# Altium PCB PCB1.PcbDoc
Units mil, origin at the board's own origin, x right, y up, seen from the top; angles counter-clockwise.
Board outline 2850 x 2500 mil, 2 copper layers (Top Layer, Bottom Layer); 16 components, 5 nets, 36 pads, 0 vias.
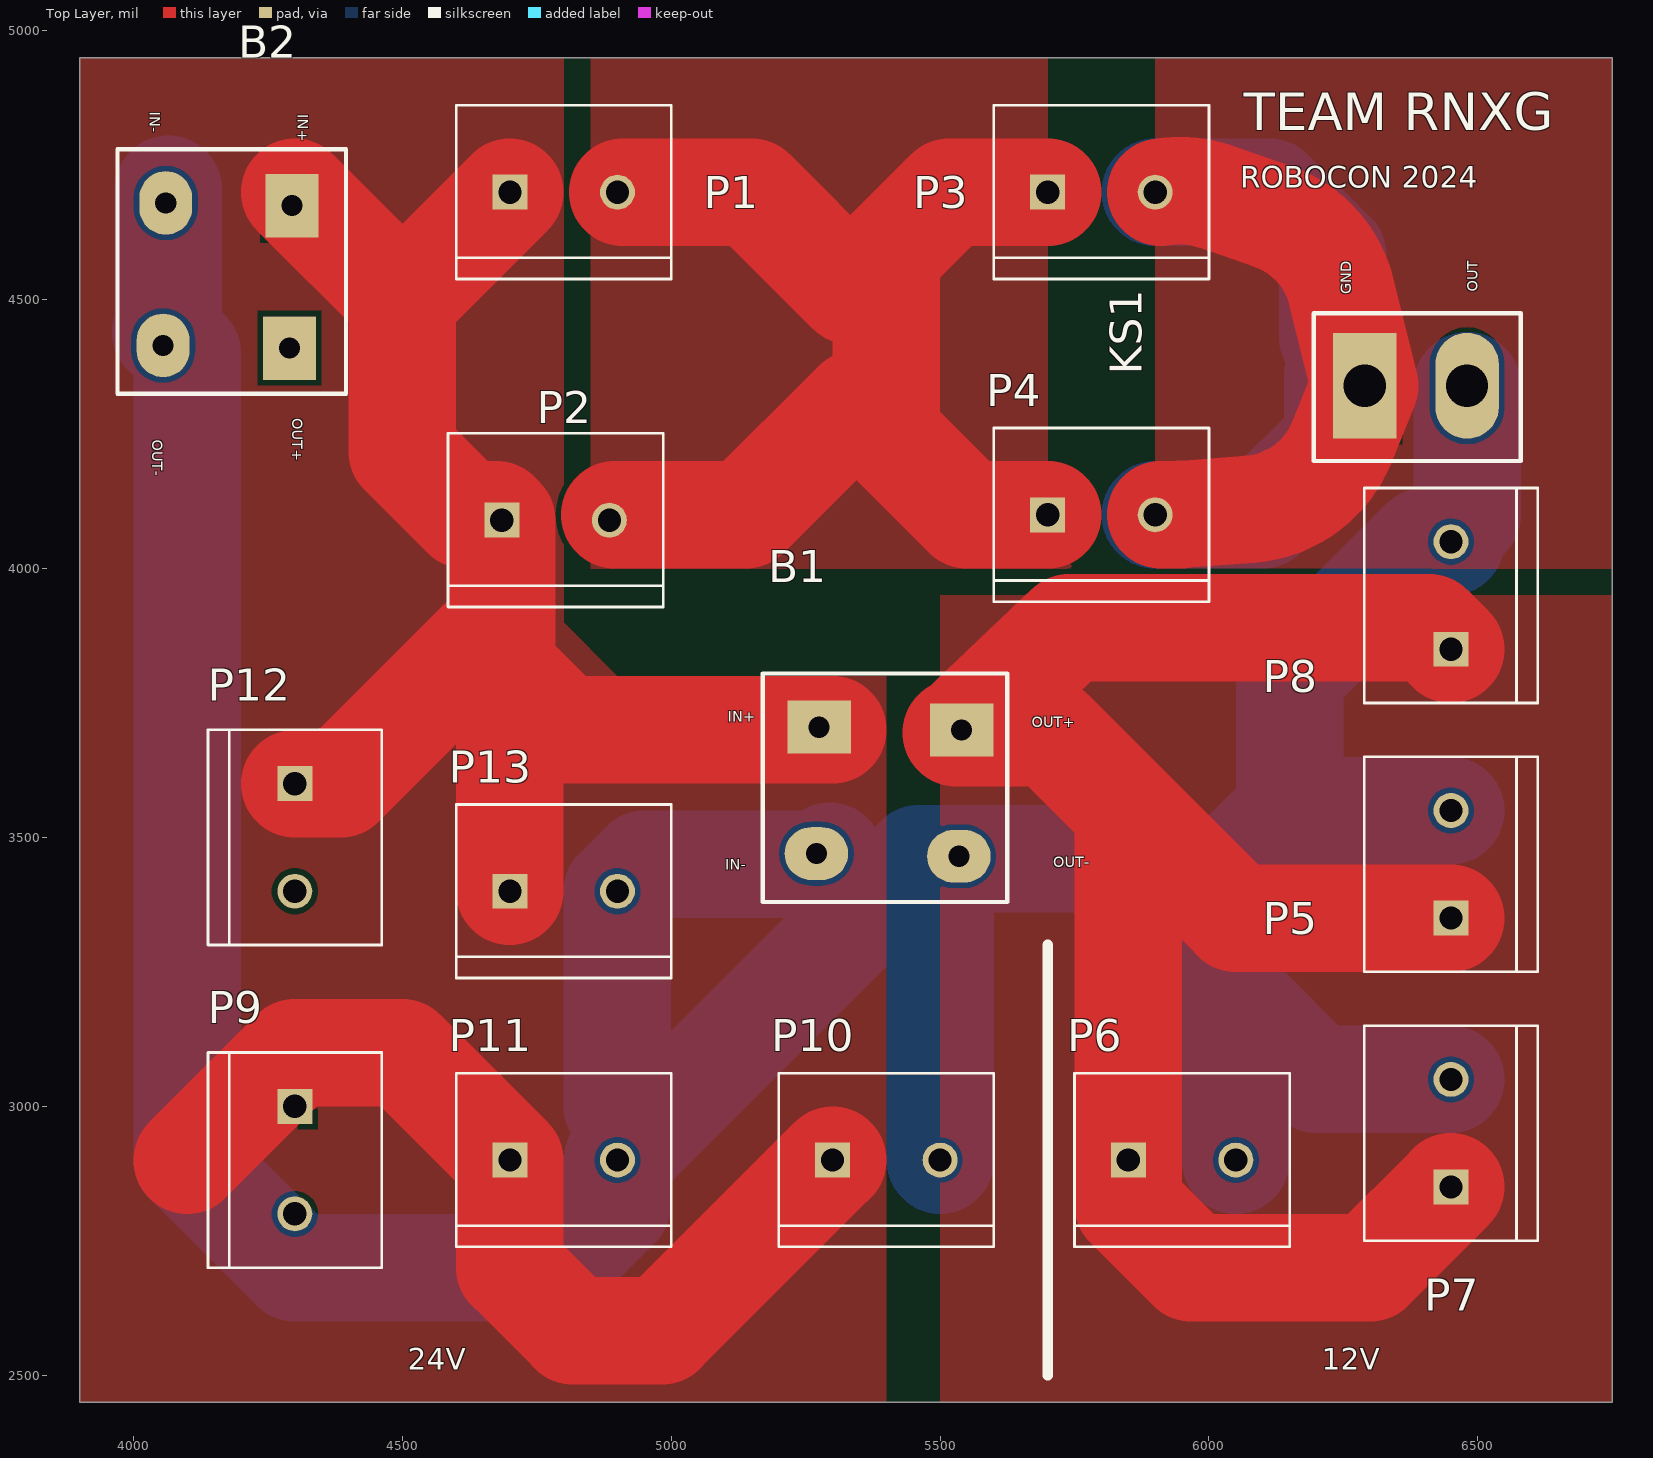
[diagram p0: Top Layer view]
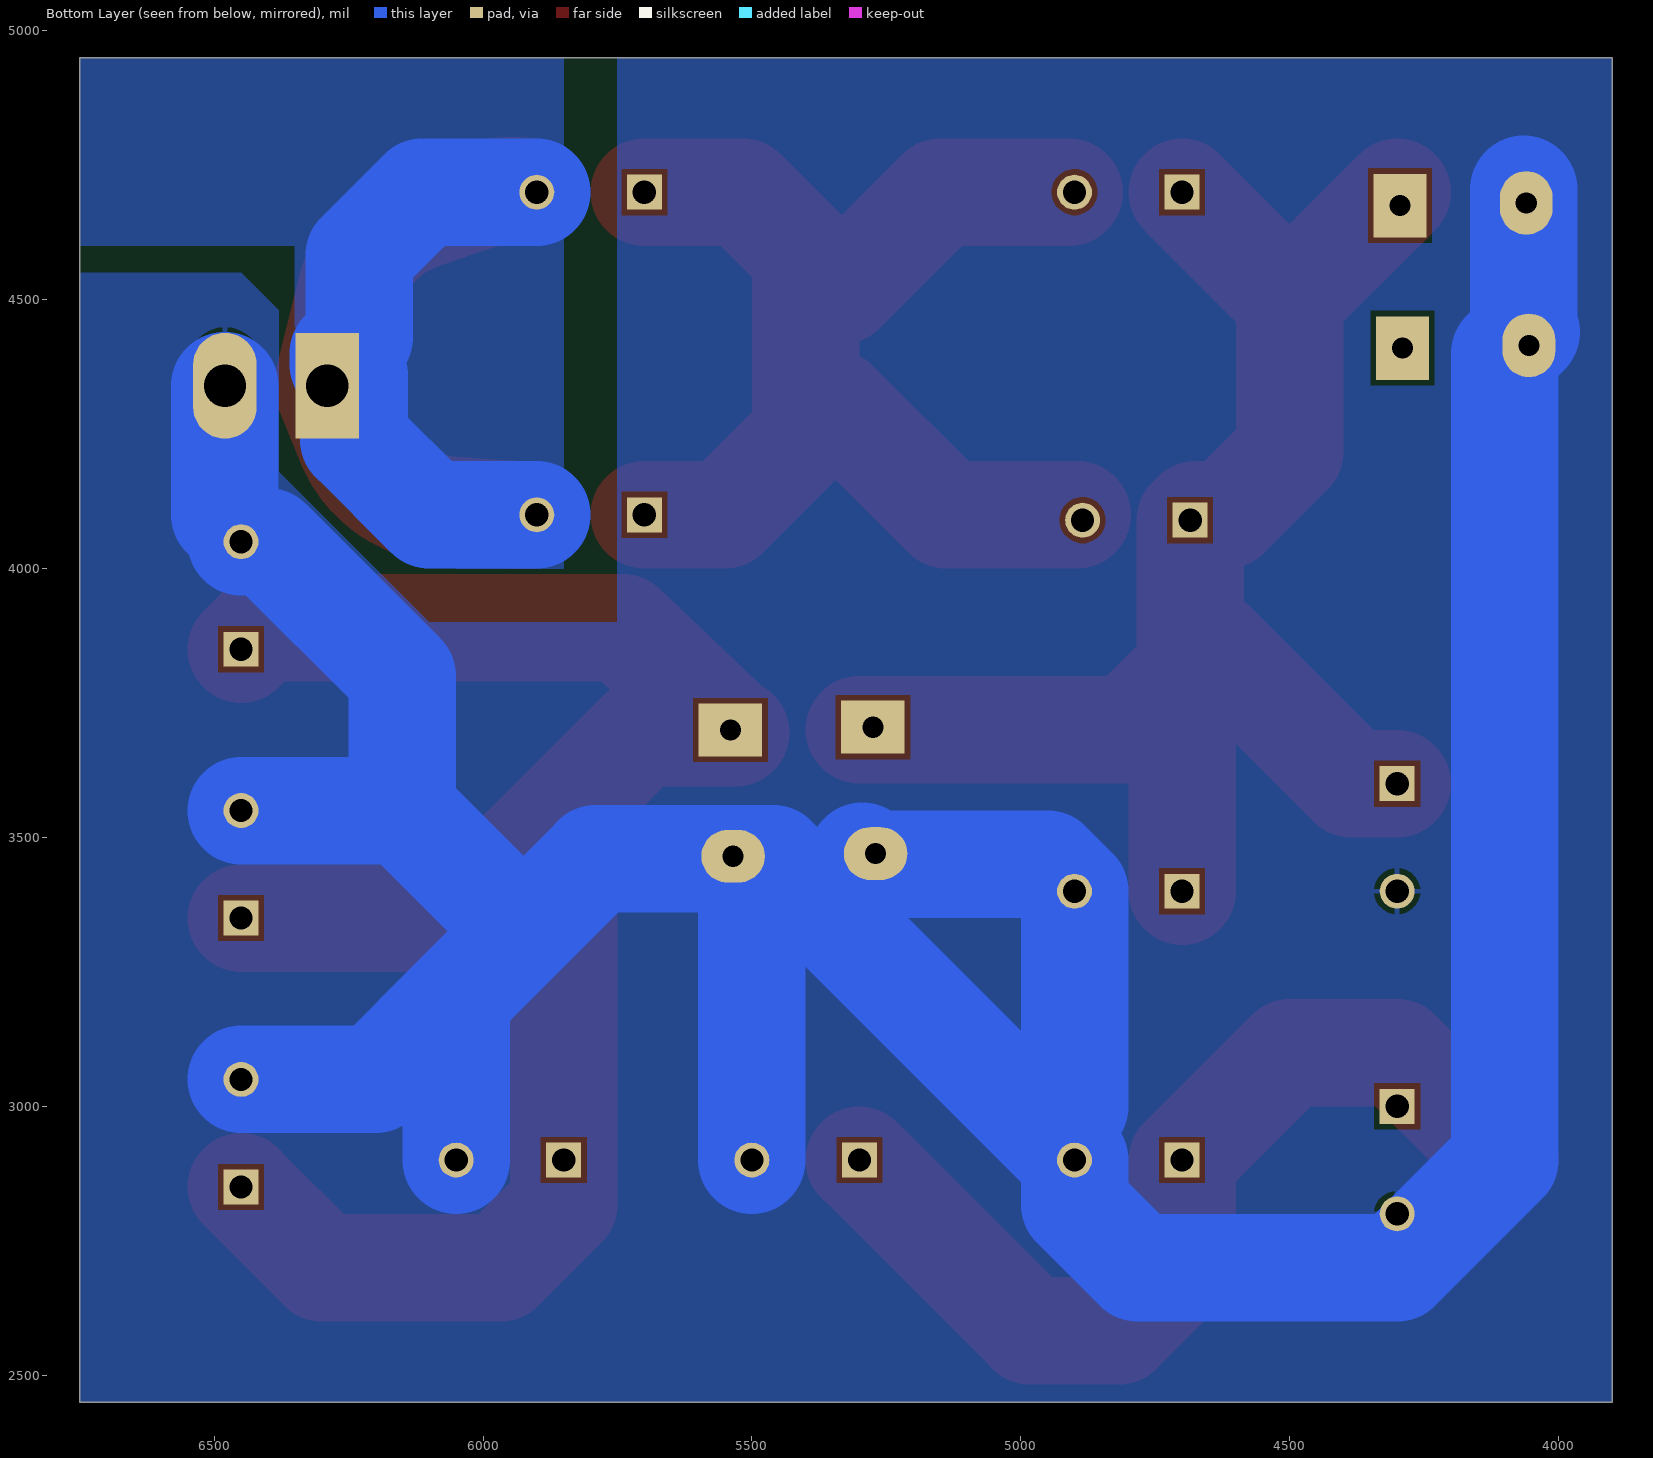
[diagram p1: Bottom Layer view, seen from below]
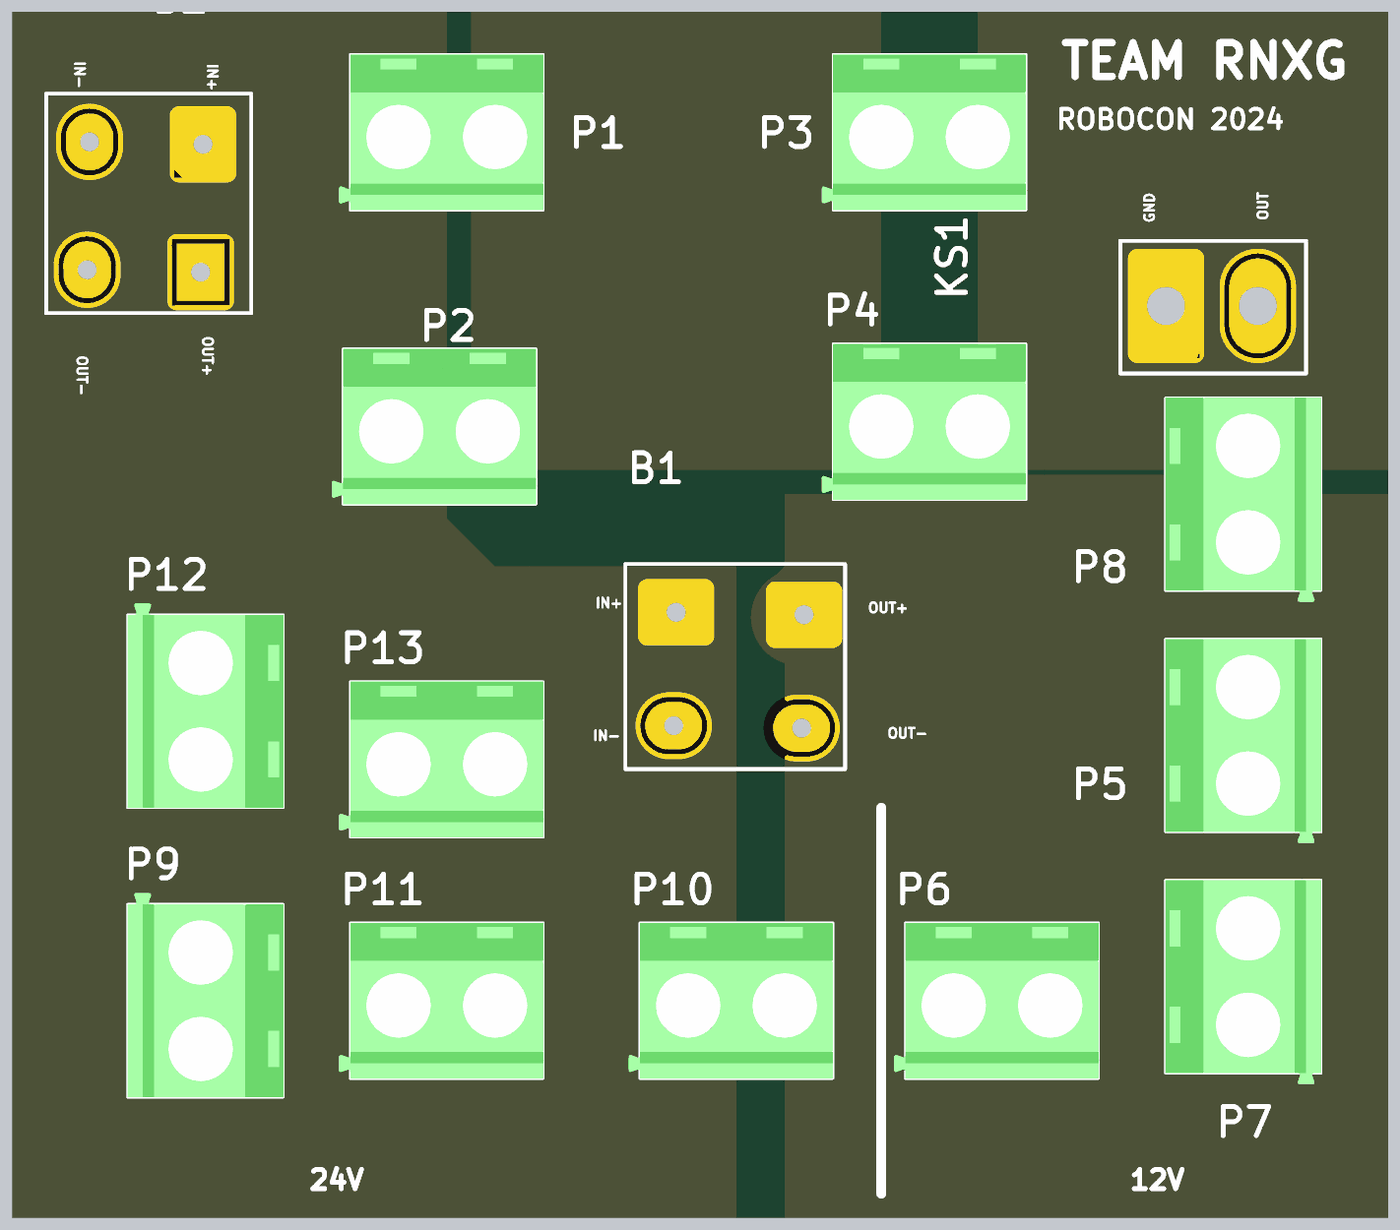
[diagram p2: 3D render of the assembled board from above, using the file's embedded part models]

## Layer stack, top to bottom
Top Solder: solder mask 0.4, Solder Resist, Dk 3.5
Top Layer: signal copper 2.7559
Dielectric 1: dielectric 12.6, FR-4, Dk 4.8
Bottom Layer: signal copper 2.7559
Bottom Solder: solder mask 0.4, Solder Resist, Dk 3.5

## Board outline
6750,4950 3900,4950 3900,2450 6750,2450

## Design rules (kind name [scope] priority, off if disabled: settings)
Clearance [All] p1: gap=10 ignorepadtopadclearanceinfootprint=FALSE ismatrix=TRUE
PlaneClearance [All] p1: clearance=100
PlaneConnect [All] p1: planeconnectstyle=Direct reliefexpansion=20 reliefentries=4 reliefconductorwidth=10 reliefairgap=10
PolygonConnect [All] p1: connectstyle=Relief reliefconductorwidth=10 reliefentries=4 polygonreliefangle="90 Angle" airgapwidth=10
RoutingVias [All] p1: holewidth=28 width=50 viastyle="Through Hole" minholewidth=28 minwidth=50 maxholewidth=28 maxwidth=50
SolderMaskExpansion [All] p1: expansion=20 istentingtop=FALSE
Width [All] p1: maxlimit=300 minlimit=10 preferedwidth=200 minimp=50.000000 maximp=50.000000 favimp=50.000000
28 further rules are at their usual default settings.

## Components (designator, comment, footprint, x,y, rotation, side; value= is the part's Value field where it differs from the comment)
B1 "BUCK" BUCK 5170,3805 r0 top
B2 "BUCK" BUCK 4395,4780 r270 top
KS1 "KS" KS 6195,4200 r90 top
P1 "BATTERY1" TE_282837-2 4800,4700 r0 top
P2 "BATTERY2" TE_282837-2 4785,4090 r0 top
P3 "BATTERY3" TE_282837-2 5800,4700 r0 top
P4 "BATTERY4" TE_282837-2 5800,4100 r0 top
P5 "282837-2" TE_282837-2 6450,3450 r90 top
P6 "282837-2" TE_282837-2 5950,2900 r0 top
P7 "282837-2" TE_282837-2 6450,2950 r90 top
P8 "282837-2" TE_282837-2 6450,3950 r90 top
P9 "282837-2" TE_282837-2 4300,2900 r270 top
P10 "282837-2" TE_282837-2 5400,2900 r0 top
P11 "282837-2" TE_282837-2 4800,2900 r0 top
P12 "282837-2" TE_282837-2 4300,3500 r270 top
P13 "282837-2" TE_282837-2 4800,3400 r0 top

## Footprints (in the part's own frame and the unit in brackets; to place one, negate y for a bottom-side part, rotate by r counter-clockwise, add the part's x,y. Pads: shape width x height; smd on the part's side, far side on the other; paste and mask are expansions set on the pad)
BUCK [mm]
  rect 3x2.5 hole 1: 1(2.667,-2.54) 3(9.398,-2.667)
  oval 3x2.5 hole 1: 2(2.54,-8.509) 4(9.271,-8.636)
  silkscreen extent 0,-10.79 11.56,0
KS [mm]
  rect 5x3 hole 2: 1(3.556,-2.413)
  oval 5x3 hole 2: 2(3.556,-7.239)
  silkscreen extent 0,-9.78 6.98,0
TE_282837-2 [mm]
  rect 1.65x1.65 / inner round 1.65 / far side rect 1.65x1.65 hole 1.1: 1(-2.54,0)
  round 1.65 hole 1.1: 2(2.54,0)
  silkscreen extent -5.08,-4.1 5.08,4.1, body extent -5.68,-4.1 5.08,4.1, height 10

## Part data
P1 P2 P3 P4: library part 282837-2, "Ð Ð°Ð·ÑŠÐµÐ¼Ð½Ñ‹Ðµ ÐºÐ»ÐµÐ¼Ð¼Ð½Ñ‹Ðµ ÐºÐ¾Ð»Ð¾Ð´ÐºÐ¸ Ð Ð¾Ð·ÐµÑ‚ÐºÐ° 2 Ð¿Ð¾Ð»Ð¾Ð¶ÐµÐ½Ð¸Ñ 5,08 Ð¼Ð¼ ÐŸÑ€Ð¸Ð¿Ð¾Ð¹ Ð¿Ñ€ÑÐ¼Ð¾Ð¹ Ñ‡ÐµÑ€ÐµÐ· Ð¾Ñ‚Ð²ÐµÑ€ÑÑ‚Ð¸Ðµ 13,5 Ð / ÐºÐ¾Ð½Ñ‚Ð°ÐºÑ‚", Package=None, Availability="In Stock", Check_prices=https://www.snapeda.com/parts/282837-2/TE+Connectivity+AMP+Connectors/view-part/?ref=eda, MF="TE Connectivity", MP=282837-2, Price=None, Purchase-URL=https://pricing.snapeda.com/search/part/282837-2/?ref=eda, SnapEDA_Link=https://www.snapeda.com/parts/282837-2/TE+Connectivity+AMP+Connectors/view-part/?ref=snap
P5 P6 P7 P8 P9 P10 P11 P12 P13: "Ð Ð°Ð·ÑŠÐµÐ¼Ð½Ñ‹Ðµ ÐºÐ»ÐµÐ¼Ð¼Ð½Ñ‹Ðµ ÐºÐ¾Ð»Ð¾Ð´ÐºÐ¸ Ð Ð¾Ð·ÐµÑ‚ÐºÐ° 2 Ð¿Ð¾Ð»Ð¾Ð¶ÐµÐ½Ð¸Ñ 5,08 Ð¼Ð¼ ÐŸÑ€Ð¸Ð¿Ð¾Ð¹ Ð¿Ñ€ÑÐ¼Ð¾Ð¹ Ñ‡ÐµÑ€ÐµÐ· Ð¾Ñ‚Ð²ÐµÑ€ÑÑ‚Ð¸Ðµ 13,5 Ð / ÐºÐ¾Ð½Ñ‚Ð°ÐºÑ‚", Package=None, Availability="In Stock", Check_prices=https://www.snapeda.com/parts/282837-2/TE+Connectivity+AMP+Connectors/view-part/?ref=eda, MF="TE Connectivity", MP=282837-2, Price=None, Purchase-URL=https://pricing.snapeda.com/search/part/282837-2/?ref=eda, SnapEDA_Link=https://www.snapeda.com/parts/282837-2/TE+Connectivity+AMP+Connectors/view-part/?ref=snap

## Nets (pads, with @x,y where several pads share a name; then routed paths per layer and width w, separated by ;. In a path a pad name is that pad's centre, name@x,y a point inside that pad or via, vN(x,y) a via of type N, cw(c..) or ccw(c..) an arc to the next point about the centre after c; other vN are vias at no path point)
12V: B1.3 P5.1 P6.1 P7.1 P8.1 | length 3508.8
  Top Layer w200: B1.3@5530,3695 5705,3695 5850,3550 ; B1.3 5740.17,3890 6410,3890 P8.1 ; P7.1 6300,2700 5967.16,2700 5850,2817.16 P6.1 5850,3550 ; P5.1 6050,3350 5850,3550
24V: B1.1 B2.1 P1.1 P2.1 P9.1 P10.1 P11.1 P12.1 P13.1 | length 4578.7
  Top Layer w200: 4100,2900 4300,3100 4500,3100 P11.1 4700,2700 4817.16,2582.84 4982.84,2582.84 P10.1 ; P12.1 4385,3600 4642.5,3857.5 4685,3815 ; B2.1@4300,4700 4500,4500 ; P13.1 4700,3700 ; P1.1 4500,4500 ; B1.1@5300,3700 4800,3700 4685,3815 ; 4500,4500 4500,4217.16 4617.16,4100 4675,4100 P2.1 4685,3815
GND: KS1.1 P3.2 P4.2 | length 2216.8
  Top Layer w200: P4.2@5910,4100 5932.32,4100 ccw(c5932.32,4300) 5947.66,4100.59 6077.1,4110.55 ccw(c6061.62,4309.95) 6246.73,4234.22 KS1.1 6246.3,4514.79 6246.27,4514.93 ccw(c6052.27,4466.28) 6117.47,4655.35 6010.55,4692.22 6010.4,4692.28 ccw(c5945.35,4503.15) 5910.36,4700.06 P3.2@5910,4700
  Bottom Layer w200: P4.2 6100,4100 6240,4240 6240,4360 KS1.1@6260,4380 ; P3.2 6112.84,4700 6230,4582.84 6230,4430 KS1.1@6260,4400
NetP1_2: P1.2 P2.2 P3.1 P4.1 | length 2077.7
  Top Layer w200: P2.2@4895,4100 5138.74,4100 5344.37,4305.63 ; P1.2@4910,4700 5150,4700 5333.58,4516.42 ; P4.1 5550,4100 5400,4250 5400,4450 5400,4582.84 5517.16,4700 P3.1
OUT: B1.2 B1.4 B2.2 B2.4 KS1.2 P5.2 P6.2 P7.2 P8.2 P9.2 P10.2 P11.2 P12.2 P13.2 | length 7983.7
  Bottom Layer w200: B2.4@4060,4440 4100,4400 4100,2900 4300,2700 4782.84,2700 4900,2817.16 P11.2 5460,3460 5560,3460 5790,3460 5925,3325 ; B2.4@4065,4440 B2.2@4065,4705 ; 4900,3000 P13.2 4950,3450 5280,3450 B1.2@5295,3465 ; P10.2 5500,3400 ; P6.2 6050,3200 ; P7.2 6200,3050 6050,3200 ; P5.2 6150,3550 ; KS1.2 6480,4100 6450,4070 P8.2 6400,4050 6150,3800 6150,3550 ; 5925,3325 6150,3550 ; 5925,3325 6050,3200
pads on no net: B2.3

## Polygon pours and split planes (outlines as drawn)
NetP1_2 on Top Layer "JOIN" (solid, remove dead copper, pour order 8): 4850,4950 4850,4000 5750,4000 5700,4050 5700,4950
GND on Top Layer "GND" (solid, remove dead copper, pour order 2): 5900,4950 5900,4000 6750,4000 6750,4950
12V on Top Layer "12V" (solid, remove dead copper, pour order 1): 5500,3950 5500,2450 6750,2450 6750,3950
24V on Top Layer "24V" (solid, remove dead copper, pour order 0): 3900,4950 4800,4950 4800,3900 4900,3800 5400,3800 5400,2450 3900,2450
GND on Bottom Layer "GND" (solid, remove dead copper, pour order 7): 5850,4950 5850,4000 6050,4000 6350,4300 6350,4600 6750,4600 6750,4950
OUT on Bottom Layer "OUT_L02_P003" (solid, remove dead copper, pour order 3): 6750,4550 6450,4550 6380,4480 6380,4180 6100,3900 5750,3900 5750,4950 3900,4950 3900,2450 6750,2450

## Silkscreen, mask and mechanical layers (free items; w line width, h text height)
Top Overlay:
  lines w20: 5700,2500 5700,3300
  text "TEAM RNXG" at 6065,4815 h70
  text "ROBOCON 2024" at 6058,4708 h40
  text "24V" at 4510,2510 h40
  text "12V" at 6210,2510 h40
Mechanical 13:
  the board outline again, w20

## Text inside footprints (layer, text, board x,y; h text height)
B1: Top Overlay "IN+" at 5105,3715 h20; Top Overlay "IN-" at 5100,3440 h20; Top Overlay "OUT+" at 5670,3705 h20; Top Overlay "OUT-" at 5710,3445 h20
B2: Top Overlay "OUT-" at 4035,4240 h20 r270; Top Overlay "OUT+" at 4295,4280 h20 r270; Top Overlay "IN-" at 4030,4850 h20 r270; Top Overlay "IN+" at 4305,4845 h20 r270
KS1: Top Overlay "OUT" at 6500,4515 h20 r90; Top Overlay "GND" at 6265,4510 h20 r90